# Altium PCB RS19ToIDC.PcbDoc
Units mm, origin at the board's own origin, x right, y up, seen from the top; angles counter-clockwise.
Board outline 102 x 15.11 mm, 2 copper layers (Top Layer, Bottom Layer); 2 components, 16 nets, 69 pads, 0 vias.
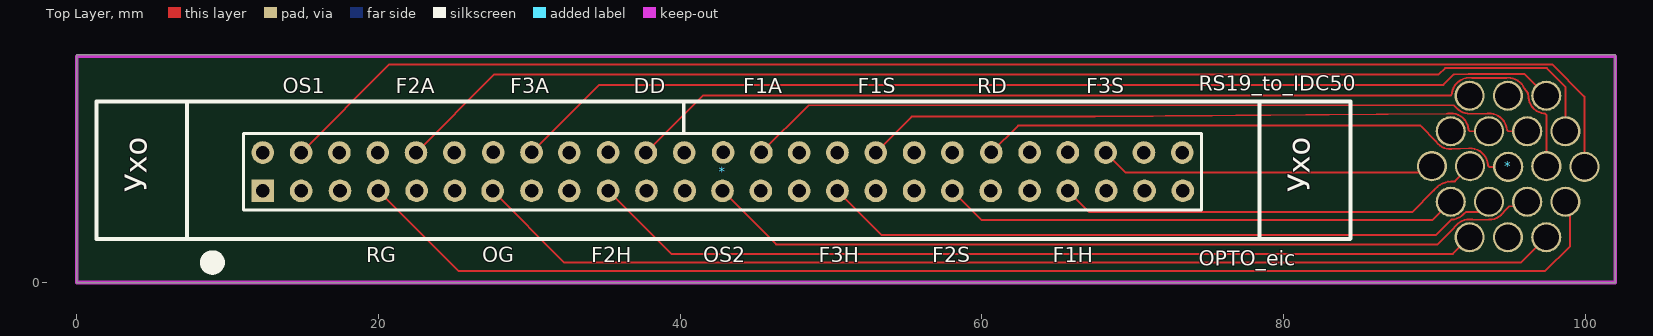
[diagram p0: Top Layer view]
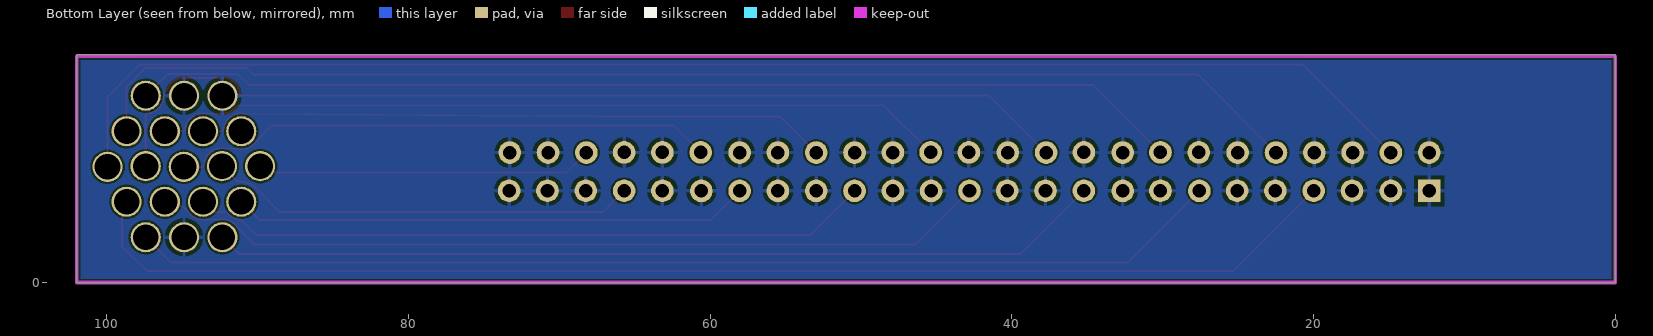
[diagram p1: Bottom Layer view, seen from below]

## Layer stack, top to bottom
Top Solder: solder mask 0.0102, Solder Resist, Dk 3.5
Top Layer: signal copper 0.0356
Dielectric 1: dielectric 0.32, FR-4, Dk 4.8
Bottom Layer: signal copper 0.0356
Bottom Solder: solder mask 0.0102, Solder Resist, Dk 3.5

## Board outline
0,6.661 0,15.104 102,15.104 102,-0.009 0,-0.009

## Design rules (kind name [scope] priority, off if disabled: settings)
BoardOutlineClearance [OnLayer('Multi-Layer')] p1: gap=0.254 ignorepadtopadclearanceinfootprint=FALSE except(0: Arc-SplitContinuation Track-SplitContinuation SMDPad-SplitContinuation THPad-SplitContinuation Via-SplitContinuation Fill-SplitContinuation Poly-SplitContinuation Region-SplitContinuation Text-SplitContinuation; 0.4: Arc-OutlineEdge Track-OutlineEdge SMDPad-OutlineEdge THPad-OutlineEdge Via-OutlineEdge Fill-OutlineEdge Poly-OutlineEdge Region-OutlineEdge Text-OutlineEdge)
Clearance [All] p1: gap=0.125 ignorepadtopadclearanceinfootprint=TRUE
DiffPairsRouting [All] p1: maxlimit=0.254 minlimit=0.127 mostfreqgap=0.13 toplayer_minwidth=0.127 toplayer_maxwidth=0.381 toplayer_prefwidth=0.37 bottomlayer_minwidth=0.127 bottomlayer_maxwidth=0.381 bottomlayer_prefwidth=0.37 maxuncoupledlength=12.7
HoleSize [All] p1: absolutevalues=TRUE maxlimit=5 minlimit=0.3 maxpercent=80.000 minpercent=20.000
MinimumSolderMaskSliver [All] p1: minsoldermaskwidth=0.1
PlaneClearance [All] p1: clearance=1
PolygonConnect [All] p1: connectstyle=Relief reliefconductorwidth=0.254 reliefentries=4 polygonreliefangle="90 Angle" airgapwidth=0.254
RoutingVias [All] p1: holewidth=0.3 width=1.27 viastyle="Through Hole" minholewidth=0.3 minwidth=0.6 maxholewidth=0.711 maxwidth=1.27
SilkToSilkClearance [All] p1: silktosilkclearance=0
SilkToSolderMaskClearance [IsPad] p1: minsilkscreentomaskgap=0 clearancetoexposedcopper=TRUE
SolderMaskExpansion [All] p1: expansion=0.102 istentingtop=FALSE
UnRoutedNet [All] p1: checkbadconnections=TRUE
Width [All] p1: maxlimit=2.5 minlimit=0.125 preferedwidth=0.37
23 further rules are at their usual default settings.

## Classes and differential pairs
component class RS19ToIDC: *

## Components (designator, comment, footprint, x,y, rotation, side; value= is the part's Value field where it differs from the comment)
* "IDC50" IDC50 46.658,6.675 r0 top locked
* "RS19" RS19 98.716,6.522 r0 top locked

## Footprints (in the part's own frame and the unit in brackets; to place one, negate y for a bottom-side part, rotate by r counter-clockwise, add the part's x,y. Pads: shape width x height; smd on the part's side, far side on the other; paste and mask are expansions set on the pad)
IDC50 [mm]
  rect 1.5x1.5 hole 0.9: 1(-34.325,-0.595)
  round 1.5 hole 0.9: 2(-34.325,1.945) 3(-31.785,-0.595) 4(-31.785,1.945) 5(-29.206,-0.588) 6(-29.245,1.945) 7(-26.666,-0.588) 8(-26.705,1.945) 9(-24.126,-0.588) 10(-24.165,1.945) 11(-21.586,-0.588) 12(-21.625,1.945) 13(-19.085,-0.595) 14(-19.046,1.952) 15(-16.506,-0.588) 16(-16.506,1.952) 17(-14.005,-0.595) 18(-14.005,1.945) 19(-11.426,-0.588) 20(-11.426,1.952) 21(-8.886,-0.588) 22(-8.925,1.945) 23(-6.346,-0.588) 24(-6.385,1.945) 25(-3.845,-0.595) 26(-3.806,1.952) 27(-1.305,-0.595) 28(-1.266,1.952) 29(1.235,-0.595) 30(1.235,1.945) 31(3.775,-0.595) 32(3.775,1.945) 33(6.315,-0.595) 34(6.315,1.945) 35(8.855,-0.595) 36(8.855,1.945) 37(11.395,-0.595) 38(11.395,1.945) 39(13.935,-0.595) 40(13.974,1.952) 41(16.514,-0.588) 42(16.514,1.952) 43(19.054,-0.588) 44(19.054,1.952) 45(21.594,-0.588) 46(21.555,1.945) 47(24.134,-0.588) 48(24.095,1.945) 49(26.674,-0.588) 50(26.635,1.945)
  silkscreen extent -45.35,-5.73 37.78,5.33
RS19 [mm]
  round 2 hole 1.7: 1(-6.372,5.866) 2(-3.832,5.866) 3(-1.292,5.866) 4(-7.622,3.509) 5(-5.089,3.509) 6(-2.556,3.509) 7(-0.022,3.509) 8(-8.872,1.195) 9(-6.344,1.195) 10(-3.815,1.152) 11(-1.287,1.195) 12(1.242,1.152) 13(-7.622,-1.162) 14(-5.089,-1.162) 15(-2.556,-1.162) 16(-0.022,-1.162) 17(-6.372,-3.519) 18(-3.832,-3.519) 19(-1.292,-3.519)

## Nets (pads, with @x,y where several pads share a name; then routed paths per layer and width w, separated by ;. In a path a pad name is that pad's centre, name@x,y a point inside that pad or via, vN(x,y) a via of type N, cw(c..) or ccw(c..) an arc to the next point about the centre after c; other vN are vias at no path point)
DD: *.11@97.429,7.717 *.22 | length 66.6
  Top Layer w0.127: *.22 41.514,12.4 91.033,12.4 91.079,12.4 91.153,12.474 91.165,12.559 cw(c92.343,12.388) 92.49,13.569 94.794,13.575 94.796,13.575 cw(c94.886,12.646) 94.886,13.58 cw(c94.886,12.389) 95.972,12.878 96.211,12.561 96.238,12.274 ccw(c97.423,12.388) 97.287,11.205 97.355,11.198 97.429,11.123 *.11@97.429,7.717
F1A: *.6@96.16,10.031 *.28 | length 52.9
  Top Layer w0.127: *.28 48.522,11.757 91.291,11.757 91.502,11.546 ccw(c92.343,12.388) 92.21,11.205 92.324,11.192 cw(c92.311,11.066) 92.325,11.192 93.539,11.22 93.599,11.221 cw(c93.627,10.031) 94.766,10.377 94.783,10.321 cw(c93.569,9.952) 94.806,10.234 94.835,10.105 94.91,10.031 94.95,10.031 *.6@96.16,10.031
F1H: *.9@92.372,7.717 *.43 | length 28.5
  Top Layer w0.127: *.43 67.134,4.665 88.527,4.665 89.949,6.087 cw(c91.213,5.125) 91.31,6.71 91.313,6.71 ; 91.313,6.71 91.366,6.71 *.9@92.372,7.717
F1S: *.5@93.627,10.031 *.34 | length 42.3
  Top Layer w0.127: *.34 55.352,10.998 67.498,10.998 90.818,11.192 90.9,11.206 cw(c91.093,10.031) 92.278,10.145 ccw(c92.405,10.158) 92.279,10.14 92.284,10.105 92.306,10.078 ccw(c92.405,10.158) 92.323,10.061 92.358,10.031 92.405,10.031 *.5@93.627,10.031
F2A: *.7@98.693,10.031 *.10@22.494,8.619 | length 82
  Top Layer w0.127: *.10@22.494,8.619 27.674,13.8 90.3,13.8 90.715,14.215 97.462,14.215 98.693,12.984 *.7@98.693,10.031
F2H: *.17@92.343,3.002 *.19@35.232,6.087 | length 59.3
  Top Layer w0.127: *.19@35.232,6.087 39.423,1.896 91.237,1.896 *.17@92.343,3.002
F2S: *.13@91.093,5.359 *.37 | length 34.3
  Top Layer w0.127: *.37 59.973,4.16 89.894,4.16 *.13@91.093,5.359
F3A: *.3@97.423,12.388 *.16@30.152,8.627 | length 70
  Top Layer w0.127: *.16@30.152,8.627 34.625,13.1 90.6,13.1 91.297,13.797 92.275,13.834 cw(c92.328,12.415) 92.328,13.835 95.977,13.834 *.3@97.423,12.388
F3H: *.14@93.627,5.359 *.31 | length 45.3
  Top Layer w0.127: *.31 53.347,3.166 90.125,3.166 91.093,4.135 91.128,4.169 ccw(c91.093,5.359) 91.935,4.518 92.108,4.69 92.957,4.69 *.14@93.627,5.359
F3S: *.8@89.843,7.717 *.46 | length 22.3
  Top Layer w0.127: *.46 69.527,7.306 89.433,7.306 89.485,7.358 *.8@89.843,7.717
GND: *.1 *.2 *.3@14.874,6.079 *.5@17.452,6.087 *.6@17.414,8.619 *.8@19.954,8.619 *.9@22.532,6.087 *.11@25.072,6.087 *.12@25.034,8.619 *.14@27.612,8.627 *.15@30.152,6.087 *.17@32.654,6.079 *.18 *.20 *.21 *.23 *.24 *.26 *.27 *.29 *.30 *.32 *.33 *.35 *.36 *.38 *.39 *.41 *.42 *.44 *.45 *.47 *.48 *.49 *.50
OG: *.13@27.574,6.079 *.19@97.423,3.002 | length 72.5
  Top Layer w0.127: *.13@27.574,6.079 32.328,1.325 95.746,1.325 *.19@97.423,3.002
OS1: *.4@14.874,8.619 *.12@99.958,7.674 | length 93
  Top Layer w0.127: *.4@14.874,8.619 20.723,14.469 97.818,14.469 99.958,12.329 *.12@99.958,7.674
OS2: *.15@96.16,5.359 *.25 | length 55.9
  Top Layer w0.127: *.25 46.362,2.531 90.234,2.531 90.234,2.538 91.273,3.577 91.394,3.723 91.429,3.764 cw(c92.343,3.002) 92.529,4.178 92.609,4.166 93.323,4.166 93.639,4.169 ccw(c93.627,5.359) 94.55,4.608 94.679,4.766 94.753,4.84 94.97,5.057 95.857,5.057 *.15@96.16,5.359
RD: *.10@94.901,7.674 *.40 | length 36.3
  Top Layer w0.127: *.40 62.41,10.405 89.08,10.405 89.154,10.331 90.081,9.399 90.13,9.332 ccw(c91.093,10.031) 91.159,8.842 92.305,8.905 cw(c92.372,7.717) 93.56,7.792 ccw(c93.687,7.801) 93.635,7.685 93.66,7.674 93.687,7.674 *.10@94.901,7.674
RG: *.7@19.992,6.087 *.16@98.693,5.359 | length 85
  Top Layer w0.127: *.7@19.992,6.087 25.326,0.753 97.335,0.753 99,2.418 99,5.053 *.16@98.693,5.359
pads on no net: *.4@91.093,10.031

## Polygon pours and split planes (outlines as drawn)
GND on Bottom Layer "GND_L02_P000" (solid, pour order 0): 0,15 0,-0.009 102,-0.009 102,15

## Keep-outs
Keep-Out Layer:
  lines w0.254: 0,0 102,0 102,15 0,15 0,0

## Silkscreen, mask and mechanical layers (free items; w line width, h text height)
Top Overlay:
  text "RS19_to_IDC50" at 74.399,12.731 h1
  text "OS1" at 13.642,12.564 h1
  text "F2A" at 21.135,12.564 h1
  text "F3A" at 28.755,12.564 h1
  text "DD" at 36.934,12.564 h1
  text "F1A" at 44.173,12.564 h1
  text "F1S" at 51.767,12.564 h1
  text "RD" at 59.718,12.564 h1
  text "F3S" at 66.931,12.564 h1
  text "RG" at 19.179,1.337 h1
  text "OG" at 26.875,1.337 h1
  text "F2H" at 34.114,1.337 h1
  text "OS2" at 41.531,1.337 h1
  text "F3H" at 49.202,1.337 h1
  text "F2S" at 56.72,1.337 h1
  text "F1H" at 64.696,1.337 h1
  text "OPTO_eic" at 74.399,1.123 h1

## Text inside footprints (layer, text, board x,y; h text height)
*: Top Overlay "Ухо" at 5.127,5.992 h2.52 r90; Top Overlay "Ухо" at 82.227,5.992 h2.52 r90